# Altium PCB McuPro.PcbDoc
Units mil, origin at the board's own origin, x right, y up, seen from the top; angles counter-clockwise.
Board outline 6000 x 4000 mil, 2 copper layers (Top Layer, Bottom Layer); 34 components, 104 nets, 282 pads, 0 vias.
Unrouted connection lines stored in the file: 168.
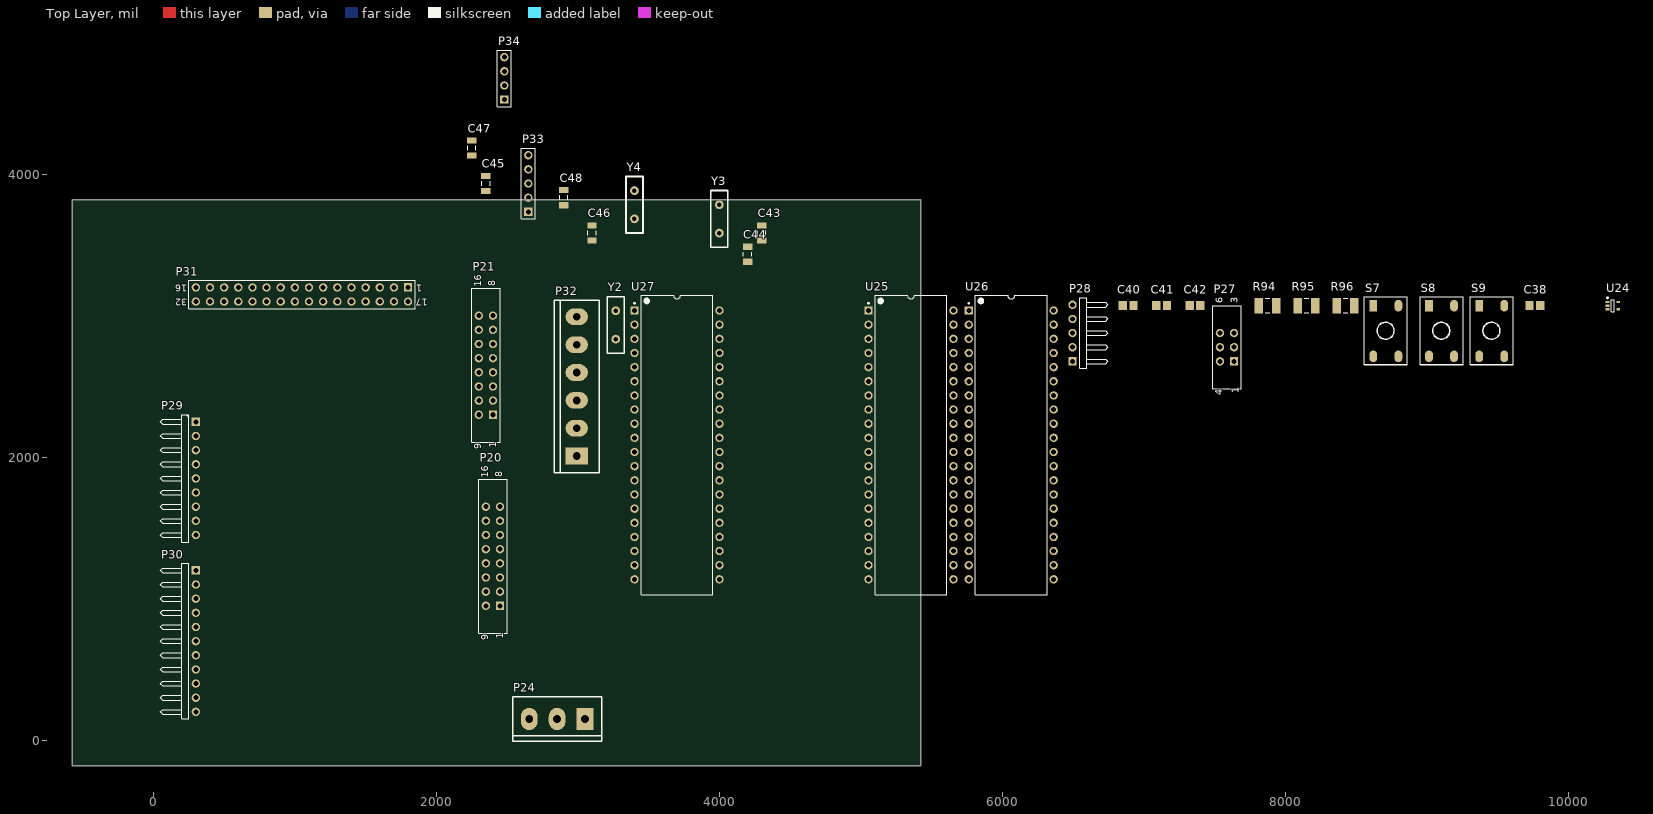
[diagram p0: Top Layer view]
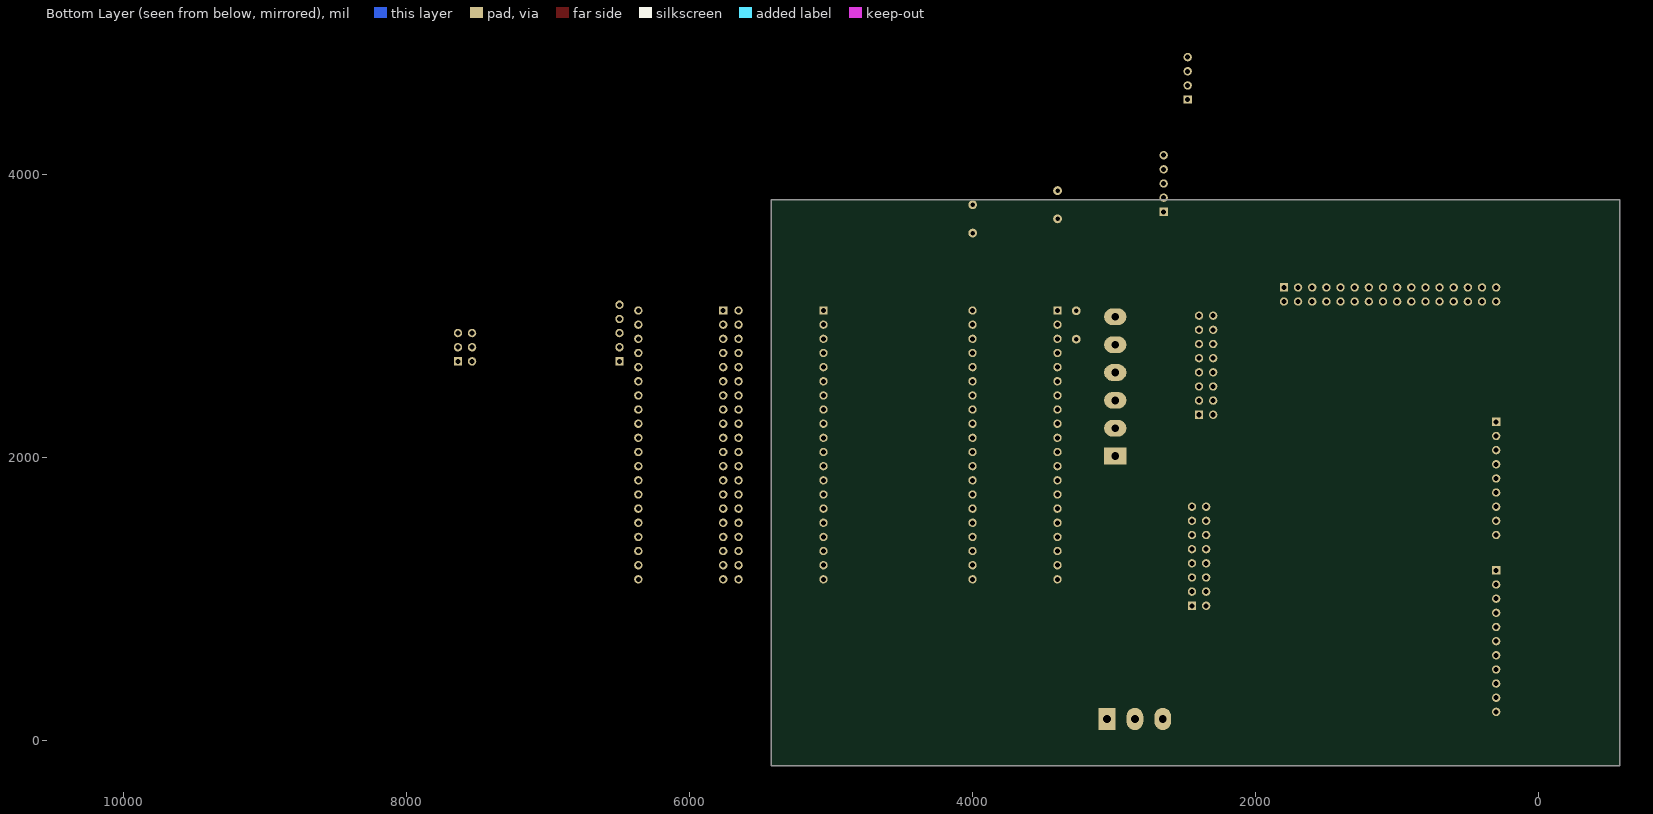
[diagram p1: Bottom Layer view, seen from below]

## Layer stack, top to bottom
Top Layer: signal copper 1.4
Dielectric: dielectric 12.6, FR-4, Dk 4.8
Bottom Layer: signal copper 1.4

## Board outline
-574.8,-181.1 5425.2,-181.1 5425.2,3818.9 -574.8,3818.9

## Design rules (kind name [scope] priority, off if disabled: settings)
Clearance [All] p1: gap=10
PolygonConnect [All] p1: connectstyle=Relief reliefconductorwidth=10 reliefentries=4 polygonreliefangle="90 Angle"
RoomDefinition McuPro [InComponentClass('McuPro')] p1: confinementstyle=ConfineIn formatcopy=TRUE lockcomponents=FALSE outline 0,0 10472.45,0 10472.45,3346.46 0,3346.46
RoutingVias [All] p1: holewidth=28 width=50 viastyle="Through Hole" minholewidth=28 minwidth=50 maxholewidth=28 maxwidth=50
SilkscreenOverComponentPads [All] p1: minsilkscreentomaskgap=10
SolderMaskExpansion [All] p1: expansion=4
Width [All] p1: maxlimit=10 minlimit=10 preferedwidth=10
27 further rules are at their usual default settings.

## Components (designator, comment, footprint, x,y, rotation, side; value= is the part's Value field where it differs from the comment)
C38 "Cap Semi" CAPC2012M 9763.78,3070.87 r0 top
C40 "Cap Semi" CAPC2012M 6889.77,3070.87 r0 top
C41 "Cap Semi" CAPC2012M 7125.99,3070.87 r0 top
C42 "Cap Semi" CAPC2012M 7362.21,3070.87 r0 top
C43 "Cap Semi" C1206 4300,3584.25 r90 top
C44 "Cap Semi" C1206 4200,3434.25 r90 top
C45 "Cap Semi" C1206 2350,3934.25 r90 top
C46 "Cap Semi" C1206 3100,3584.25 r90 top
C47 "Cap Semi" C1206 2250,4184.25 r90 top
C48 "Cap Semi" C1206 2900,3834.25 r90 top
P20 "SHEADER 2x8" "SHBH 2X8" 2450,950 r90 top
P21 "SHEADER 2x8" "SHBH 2X8" 2400,2300 r90 top
P24 "VIN" AZUL5-3 3050,150 r180 top
P27 "EMG IN" "SHBH 2x3" 7637.8,2677.17 r90 top
P28 "ACC SENS" HDR1X5H 6496.07,2677.17 r90 top
P29 "FSR IN" HDR1X9H 300,2250 r270 top
P30 "PB IN" HDR1X11H 300,1200 r270 top
P31 "ENC IN" HDR2X16_CEN 1800,3200 r180 top
P32 "RA PORT" AZUL5-6 2992.13,2007.87 r90 top
P33 "RB PORT" HDR1X5 2650,3734.25 r90 top
P34 "CCP RD" HDR1X4 2480.32,4527.56 r90 top
R94 "Res3" RESC3225M 7874.02,3070.87 r0 top
R95 "Res3" RESC3225M 8149.61,3070.87 r0 top
R96 "Res3" RESC3225M 8425.2,3070.87 r0 top
S7 "SW BT SMT" "PBOTTON SMT4" 8622.05,3070.87 r0 top
S8 "SW BT SMT" "PBOTTON SMT4" 9015.75,3070.87 r0 top
S9 "SW BT SMT" "PBOTTON SMT4" 9370.08,3070.87 r0 top
U24 "TPS71550" SOT353-5L 10314.97,3070.87 r0 top
U25 "PIC18F4553-I/P" PDIP600-P40 5354.33,2086.61 r0 top
U26 "PIC18F4553-I/P" PDIP600-P40 6062.99,2086.61 r0 top
U27 "PIC18F4553-I/P" PDIP600-P40 3700.79,2086.61 r0 top
Y2 "XTAL" XTAL-1 3267.72,2834.65 r90 top
Y3 "XTAL" XTAL-1 4000,3584.25 r90 top
Y4 "XTAL" XTAL-1 3400,3684.25 r90 top

## Footprints (in the part's own frame and the unit in brackets; to place one, negate y for a bottom-side part, rotate by r counter-clockwise, add the part's x,y. Pads: shape width x height; smd on the part's side, far side on the other; paste and mask are expansions set on the pad)
AZUL5-3 [mm]
  rect 3x4 hole 1.4: 1(0,0)
  oval 3x4 hole 1.4: 2(5,0) 3(10,0)
  silkscreen extent -3,-4 13,4
AZUL5-6 [mm]
  rect 3x4 hole 1.4: 1(0,0)
  oval 3x4 hole 1.4: 2(5,0) 3(10,0) 4(15,0) 5(20,0) 6(25,0)
  silkscreen extent -3,-4 28,4
C1206 [mm] "Chip Capacitor, Body 3.2x1.6mm, IPC High Density"
  rect 1.1x1.7 smd: 1(-1.35,0) 2(1.35,0)
  silkscreen extent -0.4,-0.75 0.4,0.75, body extent -1.7,-0.9 1.7,0.9, height 1.3
CAPC2012M [mm] "Chip Capacitor, Body 2.0x1.3mm, IPC Low Density"
  rect 1.5x1.6 smd: 1(-0.95,0) 2(0.95,0)
  body extent -1.1,-0.72 1.1,0.72, height 1.1
HDR1X4 [mm] "Connector; Header; 4 Position"
  rect 1.5x1.5 hole 0.9: 1(0,0)
  round 1.5 hole 0.9: 2(2.54,0) 3(5.08,0) 4(7.62,0)
  silkscreen extent -1.27,-1.27 8.89,1.27
HDR1X5 [mm] "Connector; Header; 5 Position"
  rect 1.5x1.5 hole 0.9: 1(0,0)
  round 1.5 hole 0.9: 2(2.54,0) 3(5.08,0) 4(7.62,0) 5(10.16,0)
  silkscreen extent -1.27,-1.27 11.43,1.27
HDR1X5H [mm] "Connector; Header; 5 Position; Right Angle"
  rect 1.5x1.5 hole 0.9: 1(0,0)
  round 1.5 hole 0.9: 2(2.54,0) 3(5.08,0) 4(7.62,0) 5(10.16,0)
  silkscreen extent -1.27,-6.35 11.43,-1.27
HDR1X9H [mm] "Connector; Header; 9 Position; Right Angle"
  rect 1.5x1.5 hole 0.9: 1(0,0)
  round 1.5 hole 0.9: 2(2.54,0) 3(5.08,0) 4(7.62,0) 5(10.16,0) 6(12.7,0) 7(15.24,0) 8(17.78,0) 9(20.32,0)
  silkscreen extent -1.27,-6.35 21.59,-1.27
HDR1X11H [mm] "Connector; Header; 11 Position; Right Angle"
  rect 1.5x1.5 hole 0.9: 1(0,0)
  round 1.5 hole 0.9: 2(2.54,0) 3(5.08,0) 4(7.62,0) 5(10.16,0) 6(12.7,0) 7(15.24,0) 8(17.78,0) 9(20.32,0) 10(22.86,0) 11(25.4,0)
  silkscreen extent -1.27,-6.35 26.67,-1.27
HDR2X16_CEN [mm] "Connector; Header; 16x2 Position"
  rect 1.5x1.5 hole 0.9: 1(0,0)
  round 1.5 hole 0.9: 2(2.54,0) 3(5.08,0) 4(7.62,0) 5(10.16,0) 6(12.7,0) 7(15.24,0) 8(17.78,0) 9(20.32,0) 10(22.86,0) 11(25.4,0) 12(27.94,0) 13(30.48,0) 14(33.02,0) 15(35.56,0) 16(38.1,0) 17(0,2.54) 18(2.54,2.54) 19(5.08,2.54) 20(7.62,2.54) 21(10.16,2.54) 22(12.7,2.54) 23(15.24,2.54) 24(17.78,2.54) 25(20.32,2.54) 26(22.86,2.54) 27(25.4,2.54) 28(27.94,2.54) 29(30.48,2.54) 30(33.02,2.54) 31(35.56,2.54) 32(38.1,2.54)
  silkscreen extent -1.27,-1.27 39.37,3.81
"PBOTTON SMT4" [mm]
  oval 1.4x2.1 smd: 1(0,-9.1) 2(4.5,-9.1) 2(4.5,0)
  rect 1.4x2.1 smd: 1(0,0)
  silkscreen extent -1.6,-10.6 6.1,1.6
PDIP600-P40 [mm] "DIP, 40-Leads, Row Spacing 15.24mm, Pitch 2.54mm, Body 51.8x13.5mm"
  rect 1.5x1.5 hole 0.9: 1(-7.62,24.13)
  round 1.5 hole 0.9: 2(-7.62,21.59) 3(-7.62,19.05) 4(-7.62,16.51) 5(-7.62,13.97) 6(-7.62,11.43) 7(-7.62,8.89) 8(-7.62,6.35) 9(-7.62,3.81) 10(-7.62,1.27) 11(-7.62,-1.27) 12(-7.62,-3.81) 13(-7.62,-6.35) 14(-7.62,-8.89) 15(-7.62,-11.43) 16(-7.62,-13.97) 17(-7.62,-16.51) 18(-7.62,-19.05) 19(-7.62,-21.59) 20(-7.62,-24.13) 21(7.62,-24.13) 22(7.62,-21.59) 23(7.62,-19.05) 24(7.62,-16.51) 25(7.62,-13.97) 26(7.62,-11.43) 27(7.62,-8.89) 28(7.62,-6.35) 29(7.62,-3.81) 30(7.62,-1.27) 31(7.62,1.27) 32(7.62,3.81) 33(7.62,6.35) 34(7.62,8.89) 35(7.62,11.43) 36(7.62,13.97) 37(7.62,16.51) 38(7.62,19.05) 39(7.62,21.59) 40(7.62,24.13)
  silkscreen extent -7.74,-26.85 6.45,26.85, body extent -7.3,-26.85 7.3,26.85, height 6.35
RESC3225M [mm] "Chip Resistor, Body 3.2x2.5mm, IPC Low Density"
  rect 1.5x2.8 smd: 1(-1.55,0) 2(1.55,0)
  silkscreen extent -0.4,-1.3 0.4,1.3, body extent -1.68,-1.32 1.68,1.32, height 0.71
"SHBH 2x3" [mm] "Shrouded Box Header: 2x3-Pin, 0.100\" (2.54 mm) Male"
  rect 1.5x1.5 hole 0.9: 1(0,0)
  round 1.5 hole 0.9: 2(2.54,0) 3(5.08,0) 4(0,2.54) 5(2.54,2.54) 6(5.08,2.54)
  silkscreen extent -4.9,-1.27 10,3.81
"SHBH 2X8" [mm] "Shrouded Box Header: 2x8-Pin, 0.100\" (2.54 mm) Male"
  rect 1.5x1.5 hole 0.9: 1(0,0)
  round 1.5 hole 0.9: 2(2.54,0) 3(5.08,0) 4(7.62,0) 5(10.16,0) 6(12.7,0) 7(15.24,0) 8(17.78,0) 9(0,2.54) 10(2.54,2.54) 11(5.08,2.54) 12(7.62,2.54) 13(10.16,2.54) 14(12.7,2.54) 15(15.24,2.54) 16(17.78,2.54)
  silkscreen extent -4.9,-1.27 22.7,3.81
SOT353-5L [mm] "SOT353, 5-Leads, Body 2x1.3mm, Pitch 0.65mm, Lead Span 2.1mm, IPC High Density"
  rect 0.65x0.4 smd: 1(-0.95,0.65) 2(-0.95,0) 3(-0.95,-0.65) 4(0.95,-0.65) 5(0.95,0.65)
  silkscreen extent -1.07,-1.1 0.25,1.52, body extent -0.7,-1.1 0.7,1.1, height 1.1
XTAL-1 [mil]
  round 62 hole 31.5: 1(0,0) 2(200,0)
  silkscreen extent -100,-60 300,60

## Part data
C38 C40 C41 C42 C43 C44 C45 C46 C47 C48: "Capacitor (Semiconductor SIM Model)"
P20 P21: library part "SB Header 2x8", "Shrouded Box Header: 2x8-Pin, 0.100\" (2.54 mm) Male"
P24: library part "Header 3", "Header, 3-Pin"
P27: library part "SB Header 2x3", "Shrouded Box Header: 2x8-Pin, 0.100\" (2.54 mm) Male"
P28: library part "Header 5H", "Header, 5-Pin, Right Angle"
P29: library part "Header 9H", "Header, 9-Pin, Right Angle"
P30: library part "Header 11H", "Header, 11-Pin, Right Angle"
P31: library part "Header 16X2A", "Header, 16-Pin, Dual row"
P32: library part "Header 6", "Header, 6-Pin"
P33: library part "Header 5", "Header, 5-Pin"
P34: library part "Header 4", "Header, 4-Pin"
R94 R95 R96: "Resistor"
S7 S8 S9: library part "SW PB 6mm", "Pushbutton Switches FSM2JSMAASTR=6MM TACT SWITCH,"
U25 U26 U27: "High Performance, Enhanced Flash, USB Microcontroller with 12-Bit A/D and nanoWatt Technology, 32K Flash, 40-Pin PDIP, Industrial Temperature Range"
Y2 Y3 Y4: "Crystal Oscillator"

## Nets (pads, with @x,y where several pads share a name; then routed paths per layer and width w, separated by ;. In a path a pad name is that pad's centre, name@x,y a point inside that pad or via, vN(x,y) a via of type N, cw(c..) or ccw(c..) an arc to the next point about the centre after c; other vN are vias at no path point)
"ACC GS": P28.5
"ACC X": P28.2 U26.8
"ACC Y": P28.3 U26.9
"ACC Z": P28.4 U26.10
EMGCH1: P27.2 U25.2
EMGCH2: P27.3 U25.3
EMGCH3: P27.6 U25.4
EMGCH4: P27.5 U25.5
EN1CHA: P31.3 U25.23
EN1CHB: P31.4 U25.24
EN2CHA: P31.7 U25.25
EN2CHB: P31.8 U25.26
EN3CHA: P31.11 U25.19
EN3CHB: P31.12 U25.20
EN4CHA: P31.15 U27.37
EN4CHB: P31.16 U27.38
EN5CHA: P31.19 U27.39
EN5CHB: P31.20 U27.40
EN6CHA: P31.23 U27.24
EN6CHB: P31.24 U27.25
EN7CHA: P31.27 U27.26
EN7CHB: P31.28 U27.19
EN8CHA: P31.31 U26.39
EN8CHB: P31.32 U26.40
EN11: P20.1 U25.16
EN12: P20.4 U25.17
EN21: P20.7 U25.15
EN22: P20.10 U27.16
EN31: P20.13 U27.15
EN32: P21.1 U27.17
EN41: P21.4 U27.23
EN42: P21.7 U26.15
EN51: P21.10 U26.19
EN52: P21.13 U26.20
FSR1: P29.2 U25.7
FSR2: P29.3 U25.33
FSR3: P29.4 U25.34
FSR4: P29.5 U25.35
FSR5: P29.6 U27.2
FSR6: P29.7 U27.3
FSR7: P29.8 U27.4
FSR8: P29.9 U27.5
IN11: P20.2 U25.21
IN12: P20.3 U25.22
IN13: P20.5 U25.27
IN14: P20.6 U25.28
IN21: P20.8 U25.29
IN22: P20.9 U25.30
IN23: P20.11 U27.20
IN24: P20.12 U27.21
IN31: P20.14 U27.22
IN32: P20.15 U27.27
IN33: P21.2 U27.28
IN34: P21.3 U27.29
IN41: P21.5 U27.30
IN42: P21.6 U27.8
IN43: P21.8 U26.23
IN44: P21.9 U26.24
IN51: P21.11 U26.21
IN52: P21.12 U26.22
IN53: P21.14 U26.27
IN54: P21.15 U26.28
"MCLR 11": C40.1 R94.2 S7.1 U25.1
"MCLR 21": C41.1 R95.2 S8.1 U27.1
"MCLR 31": C42.1 R96.2 S9.1 U26.1
"OSC 11": C43.1 U25.13 Y2.1
"OSC 12": C44.1 U25.14 Y2.2
"OSC 21": C45.1 U27.13 Y3.1
"OSC 22": C46.1 U27.14 Y3.2
"OSC 31": C47.1 U26.13 Y4.1
"OSC 32": C48.1 U26.14 Y4.2
PB1: P30.2 U25.36
PB2: P30.3 U25.37
PB3: P30.4 U25.38
PB4: P30.5 U25.39
PB5: P30.6 U25.40
PB6: P30.7 U27.33
PB7: P30.8 U27.34
PB8: P30.9 U27.35
PB9: P30.10 U27.36
PB10: P30.11 U26.38
PIC11: U25.8 U27.6
PIC12: U25.9 U27.7
PIC21: U26.25 U27.9
PIC22: U26.26 U27.10
RA0: P32.1 U26.2
RA1: P32.2 U26.3
RA2: P32.3 U26.4
RA3: P32.4 U26.5
RA4: P32.5 U26.6
RA5: P32.6 U26.7
RB0: P33.1 U26.33
RB1: P33.2 U26.34
RB2: P33.3 U26.35
RB3: P33.4 U26.36
RB4: P33.5 U26.37
RC1: P34.1 U26.16
RC2: P34.2 U26.17
RD6: P34.3 U26.29
RD7: P34.4 U26.30
V+: P24.3 U24.4
V-: P24.2
VCC: C38.1 P31.2 P31.6 P31.10 P31.14 P31.18 P31.22 P31.26 P31.30 R94.1 R95.1 R96.1 U24.5 U25.11 U25.32 U26.11 U26.32 U27.11 U27.32
VGND: C38.2 C40.2 C41.2 C42.2 C43.2 C44.2 C45.2 C46.2 C47.2 C48.2 P24.1 P27.1 P28.1 P29.1 P30.1 P31.1 P31.5 P31.9 P31.13 P31.17 P31.21 P31.25 P31.29 S7.2 S8.2 S9.2 U24.2 U25.12 U25.31 U26.12 U26.31 U27.12 U27.31
pads on no net: P20.16 P21.16 P27.4 U24.1 U24.3 U25.6 U25.10 U25.18 U26.18 U27.18

## Silkscreen, mask and mechanical layers (free items; w line width, h text height)
Mechanical 1:
  lines w10: -216.85,1044.25 -196.85,984.25 ; -216.85,3286.46 -196.85,3346.46 ; -206.85,984.25 -186.85,984.25 ; -206.85,3346.46 -186.85,3346.46 ; -196.85,1769.48 -196.85,984.25 ; -196.85,2561.23 -196.85,3346.46 ; -176.85,1044.25 -196.85,984.25 ; -176.85,3286.46 -196.85,3346.46 ; 0,3533.31 0,3553.31 ; 60,3523.31 0,3543.31 ; 60,3563.31 0,3543.31 ; 785.23,3543.31 0,3543.31 ; 1576.98,3543.31 2362.2,3543.31 ; 2302.2,3523.31 2362.2,3543.31 ; 2302.2,3563.31 2362.2,3543.31 ; 2362.2,3533.31 2362.2,3553.31
  text "2362.205 (mil)" at 795.23,3507.32 h60
  text "2362.205 (mil)" at -160.86,1779.48 h60 r90

## Text inside footprints (layer, text, board x,y; h text height)
P20: Top Overlay "9" at 2367.32,705.91 h50 r90; Top Overlay "1" at 2473.62,717.72 h50 r90; Top Overlay "8" at 2465.75,1859.45 h50 r90; Top Overlay "16" at 2367.32,1855.51 h50 r90
P21: Top Overlay "9" at 2317.32,2055.91 h50 r90; Top Overlay "1" at 2423.62,2067.72 h50 r90; Top Overlay "8" at 2415.75,3209.45 h50 r90; Top Overlay "16" at 2317.32,3205.51 h50 r90
P27: Top Overlay "6" at 7559.06,3086.61 h50 r90; Top Overlay "3" at 7665.36,3086.61 h50 r90; Top Overlay "1" at 7669.3,2452.76 h50 r90; Top Overlay "4" at 7555.12,2437.01 h50 r90
P31: Top Overlay "32" at 240,3120 h50 r180; Top Overlay "16" at 240,3220 h50 r180; Top Overlay "1" at 1900,3220 h50 r180; Top Overlay "17" at 1940,3120 h50 r180